# Altium PCB omnibothub-extcan.PcbDoc
Units mil, origin at the board's own origin, x right, y up, seen from the top; angles counter-clockwise.
Board outline 1845.1 x 2231.05 mil, 4 copper layers (Top Layer, Mid-Layer 1, Mid-Layer 2, Bottom Layer); 49 components, 65 nets, 211 pads, 76 vias.
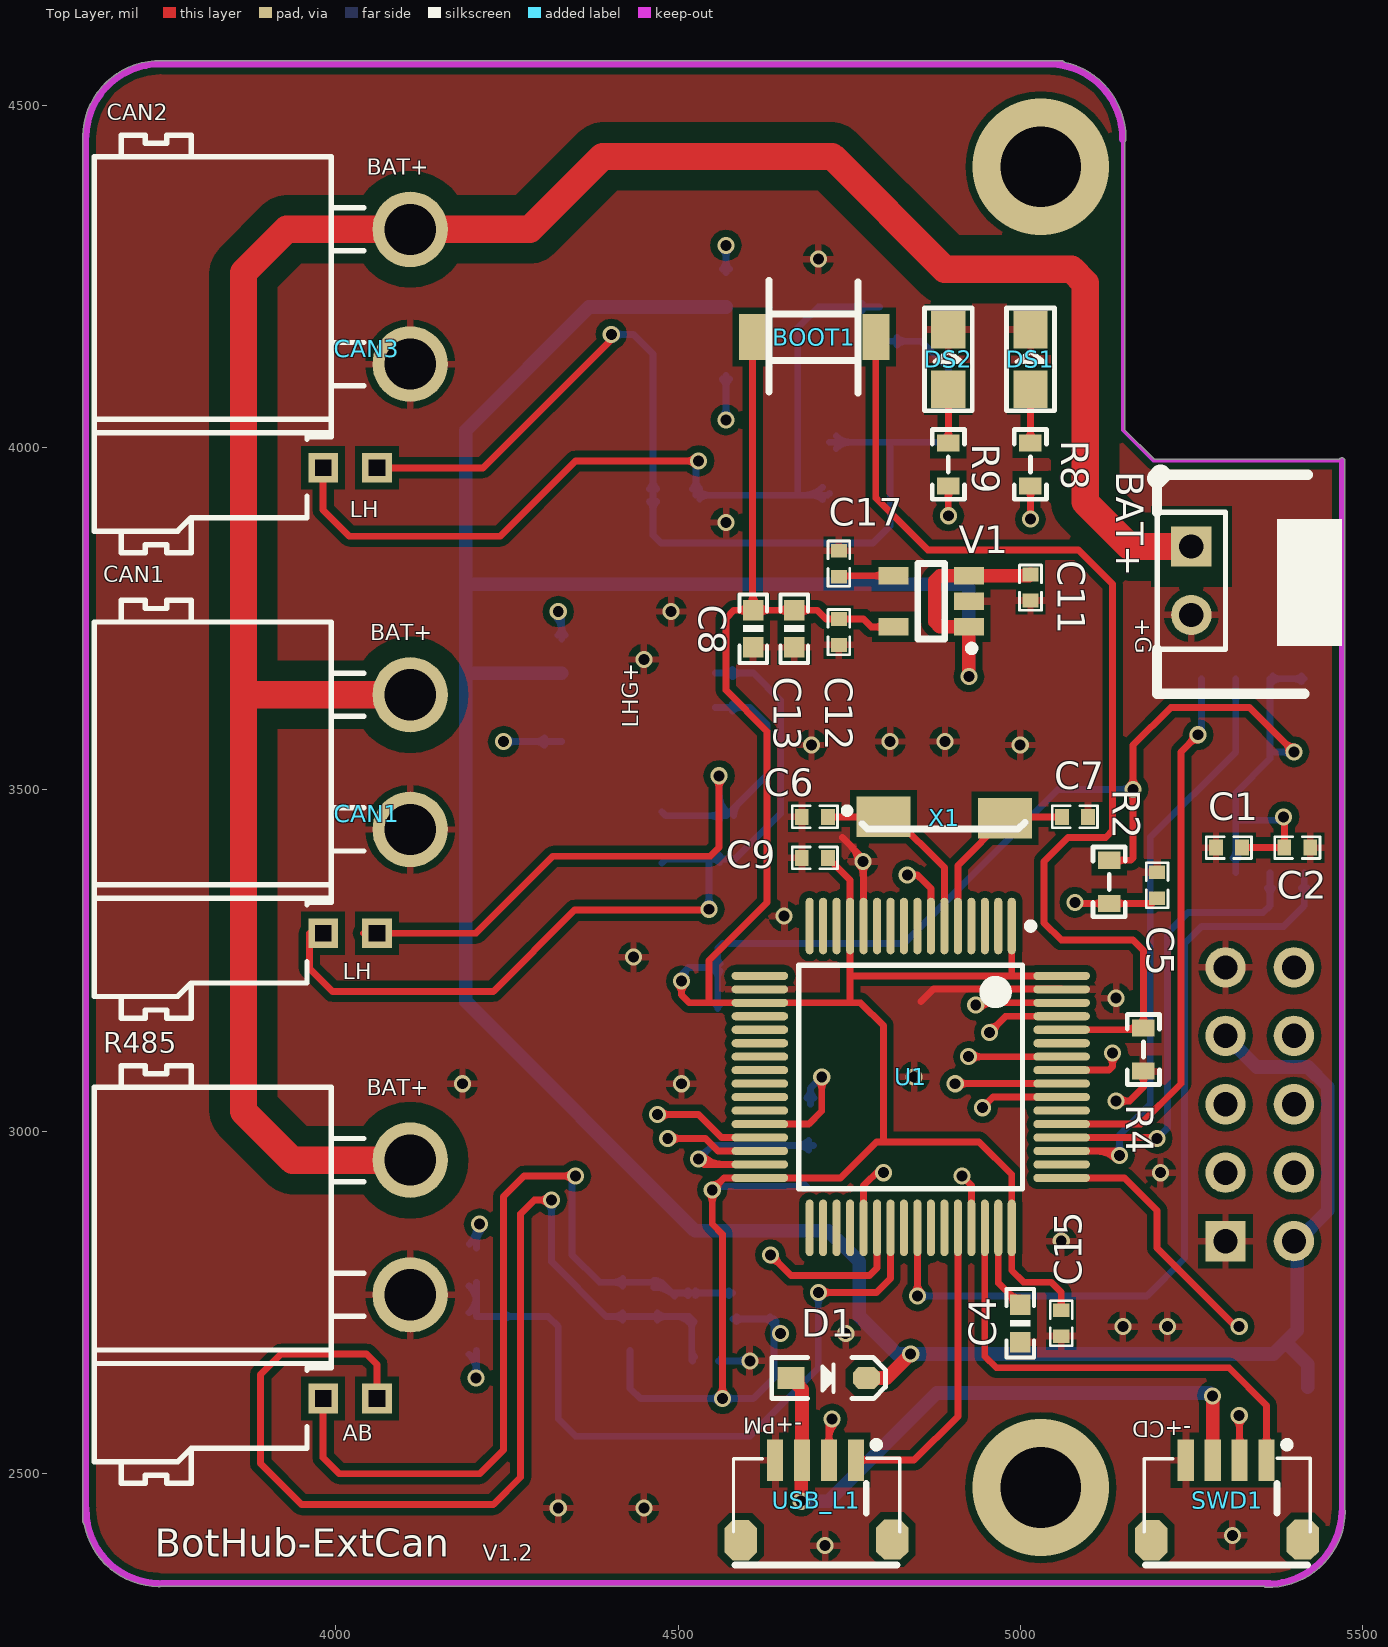
[diagram p0: Top Layer view]
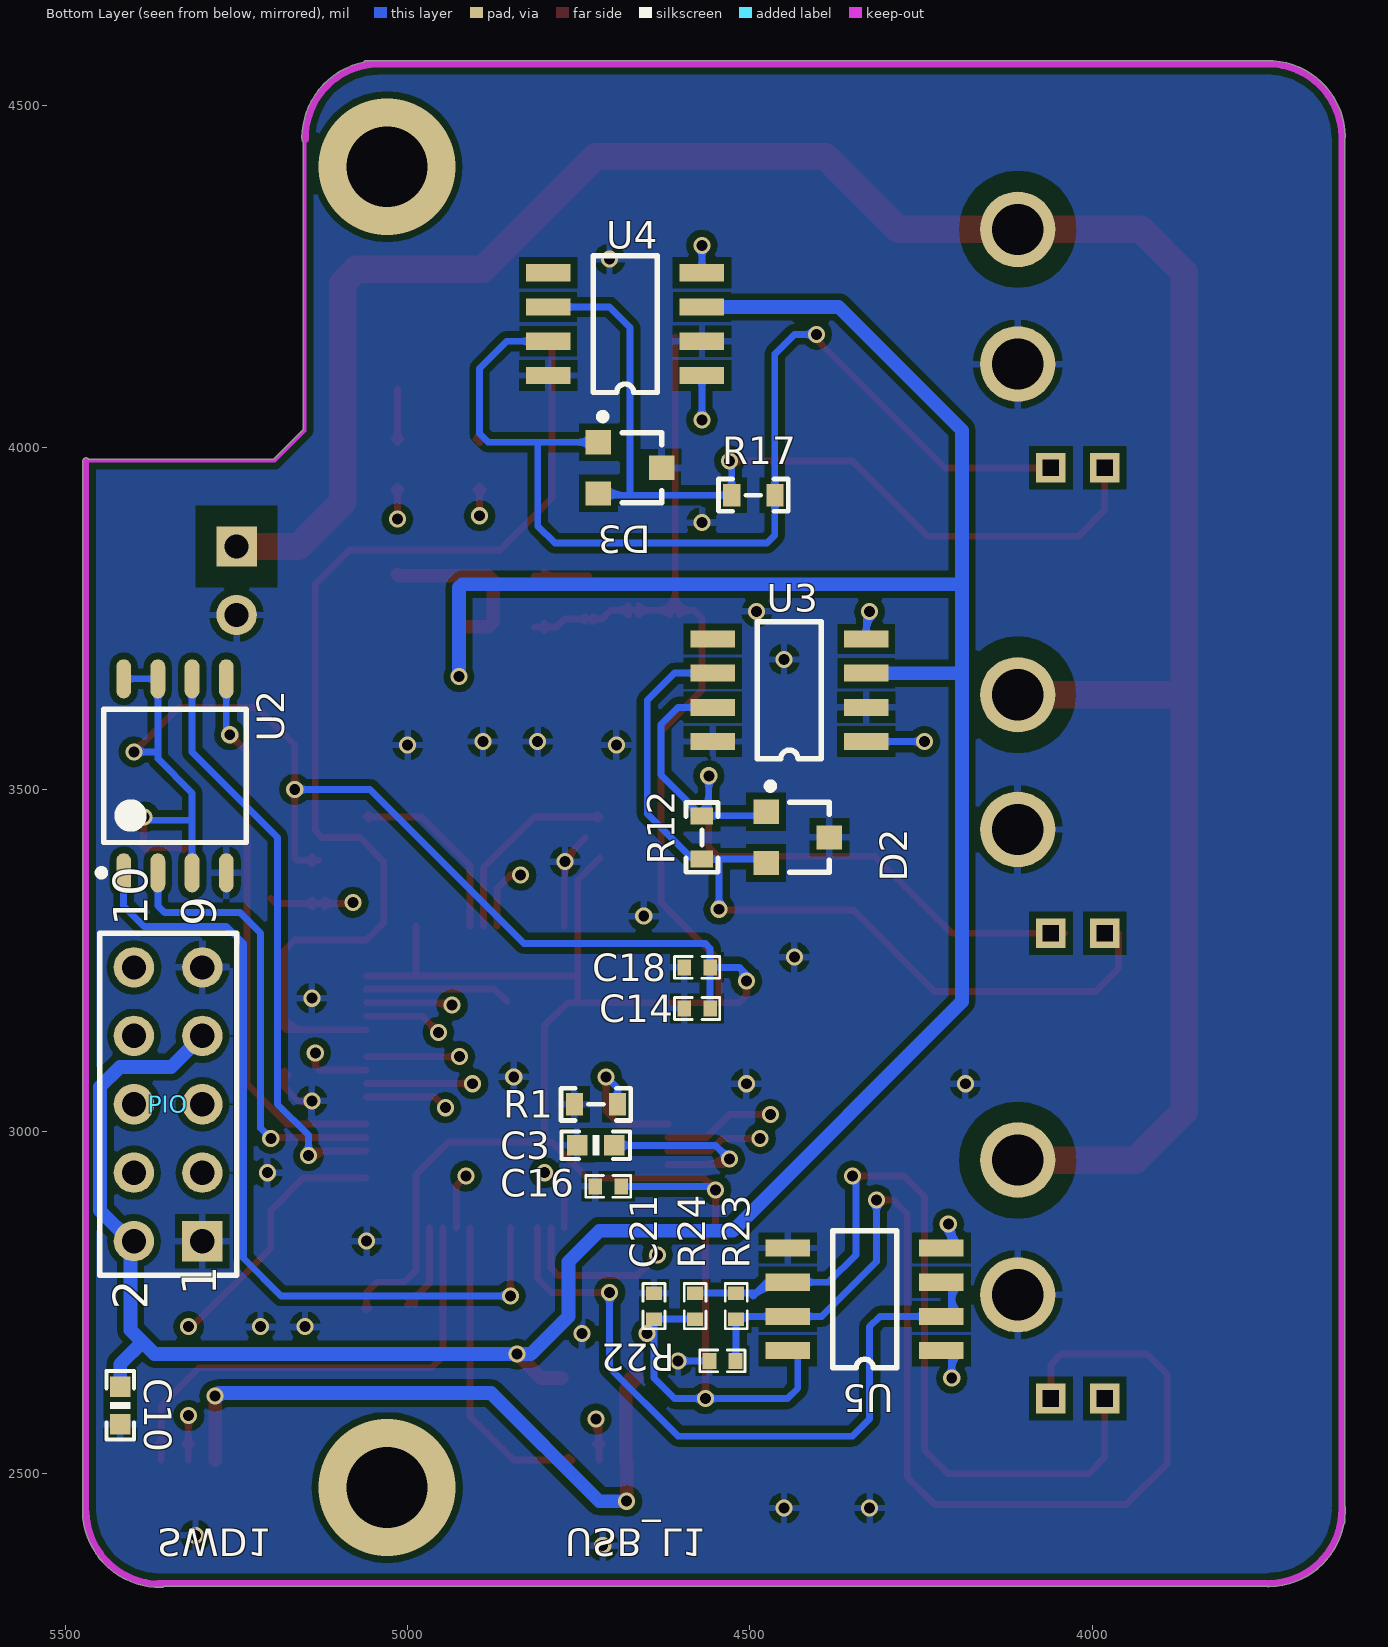
[diagram p1: Bottom Layer view, seen from below]
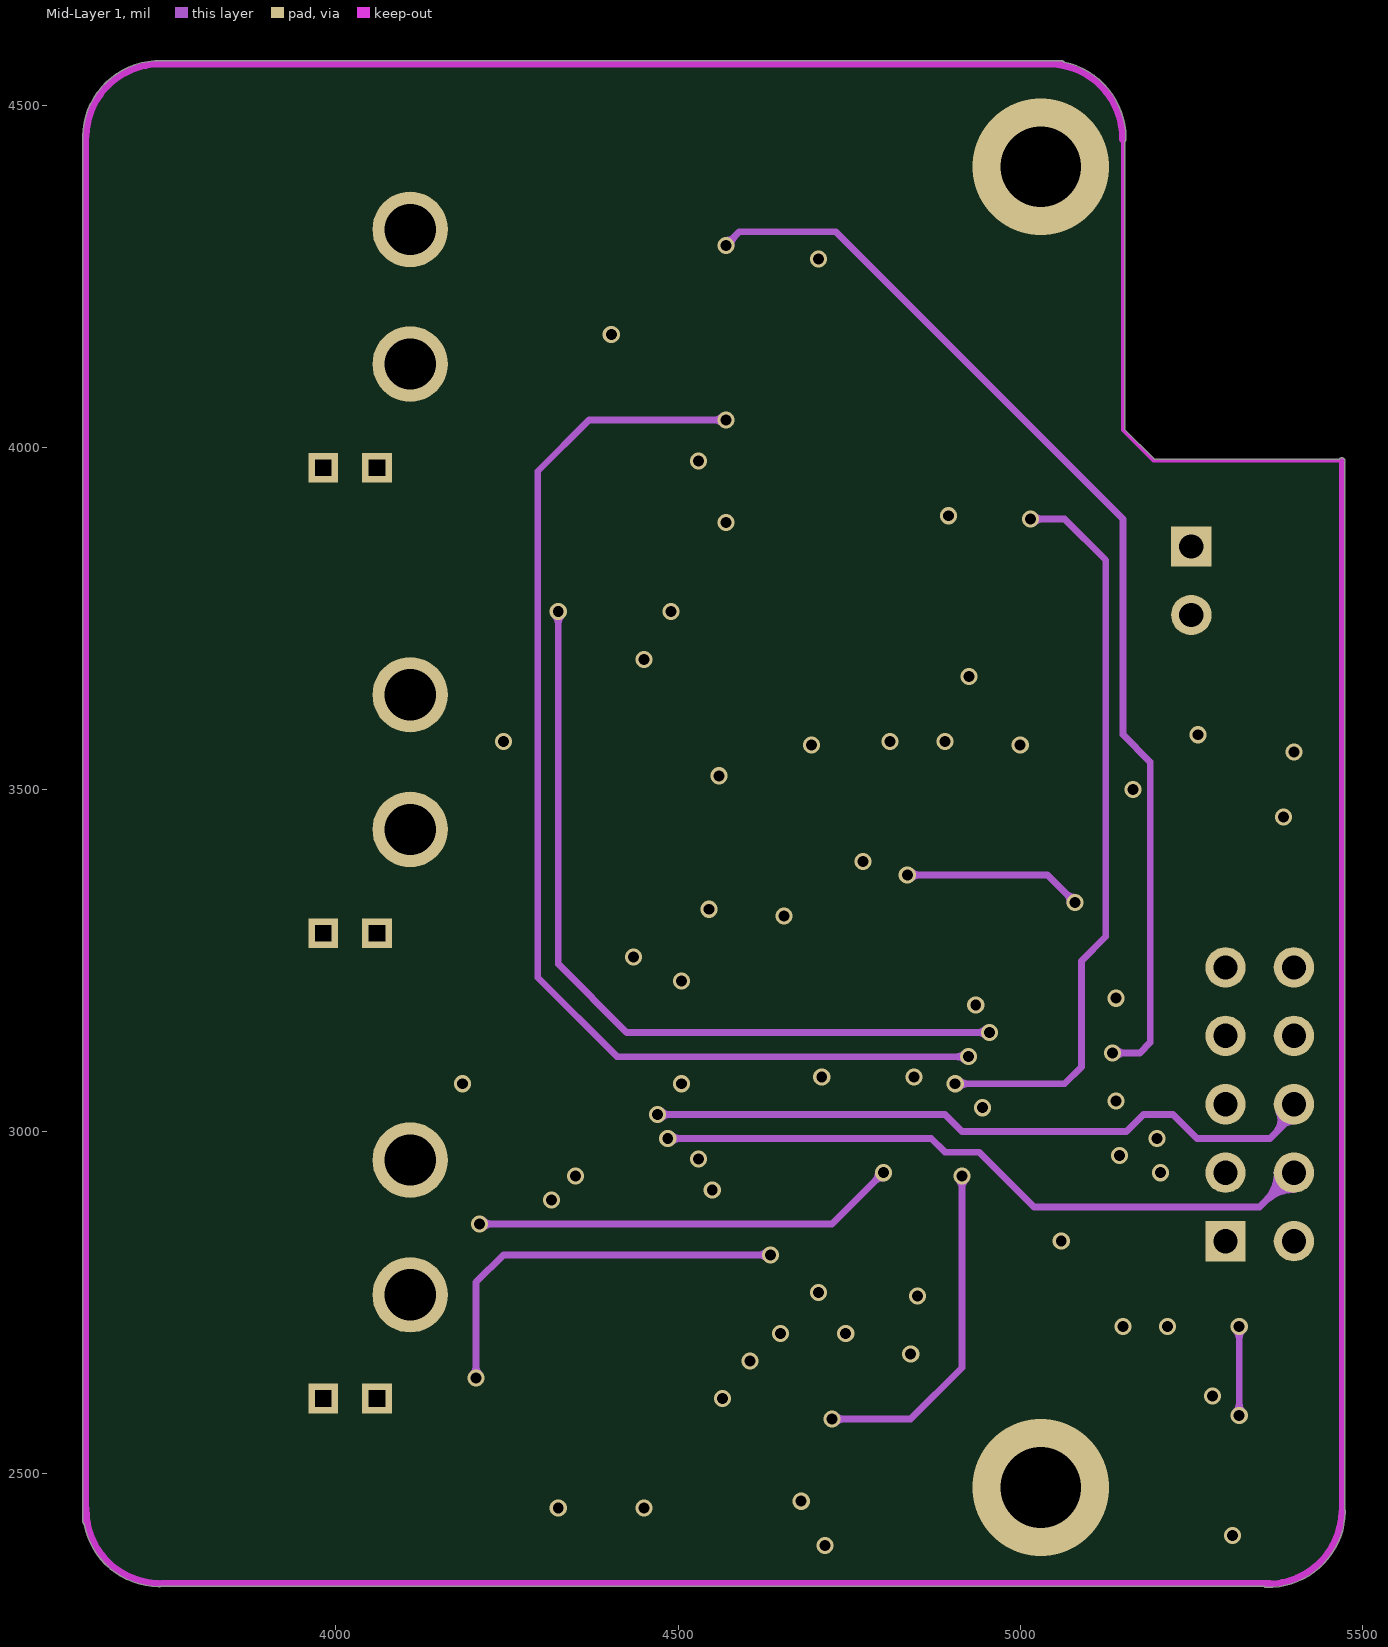
[diagram p2: Mid-Layer 1]
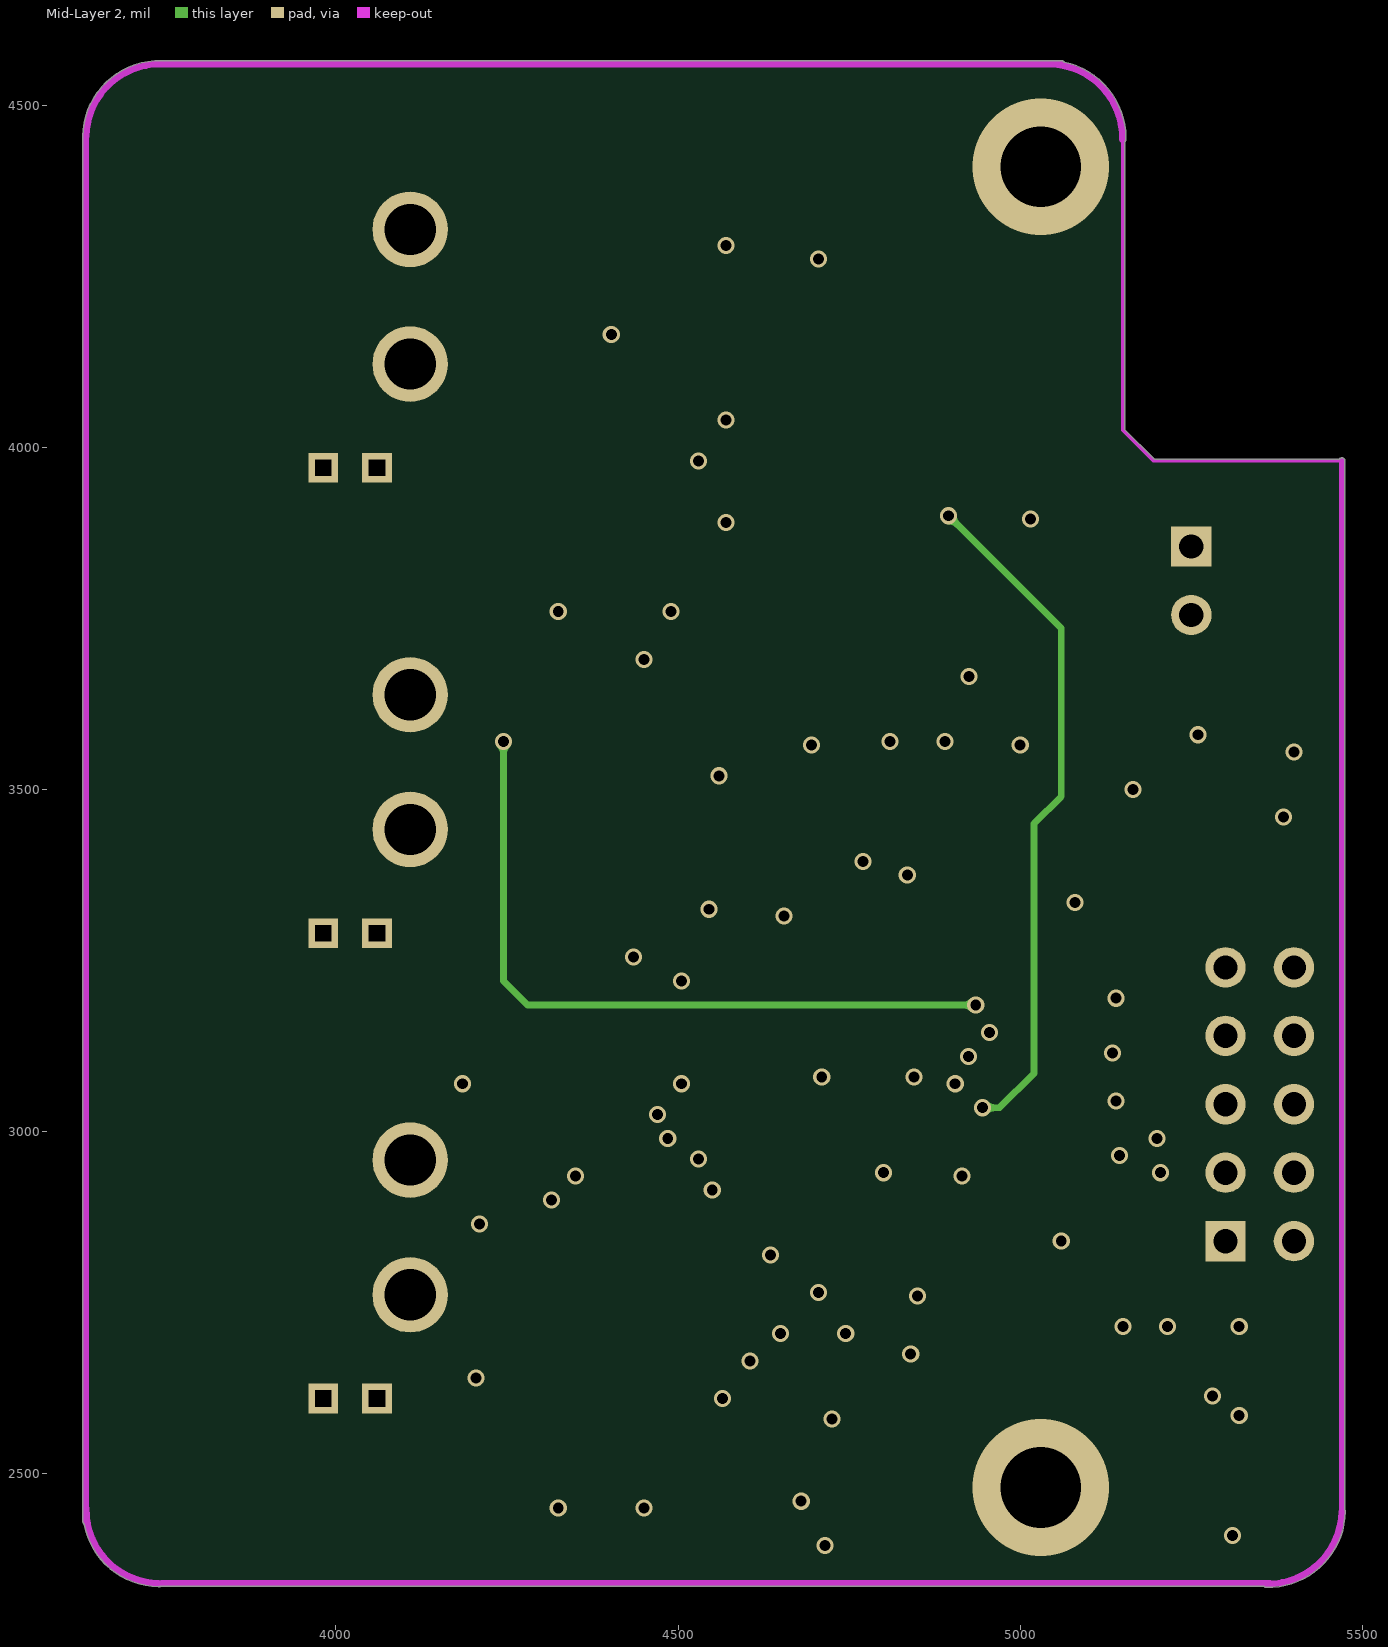
[diagram p3: Mid-Layer 2]
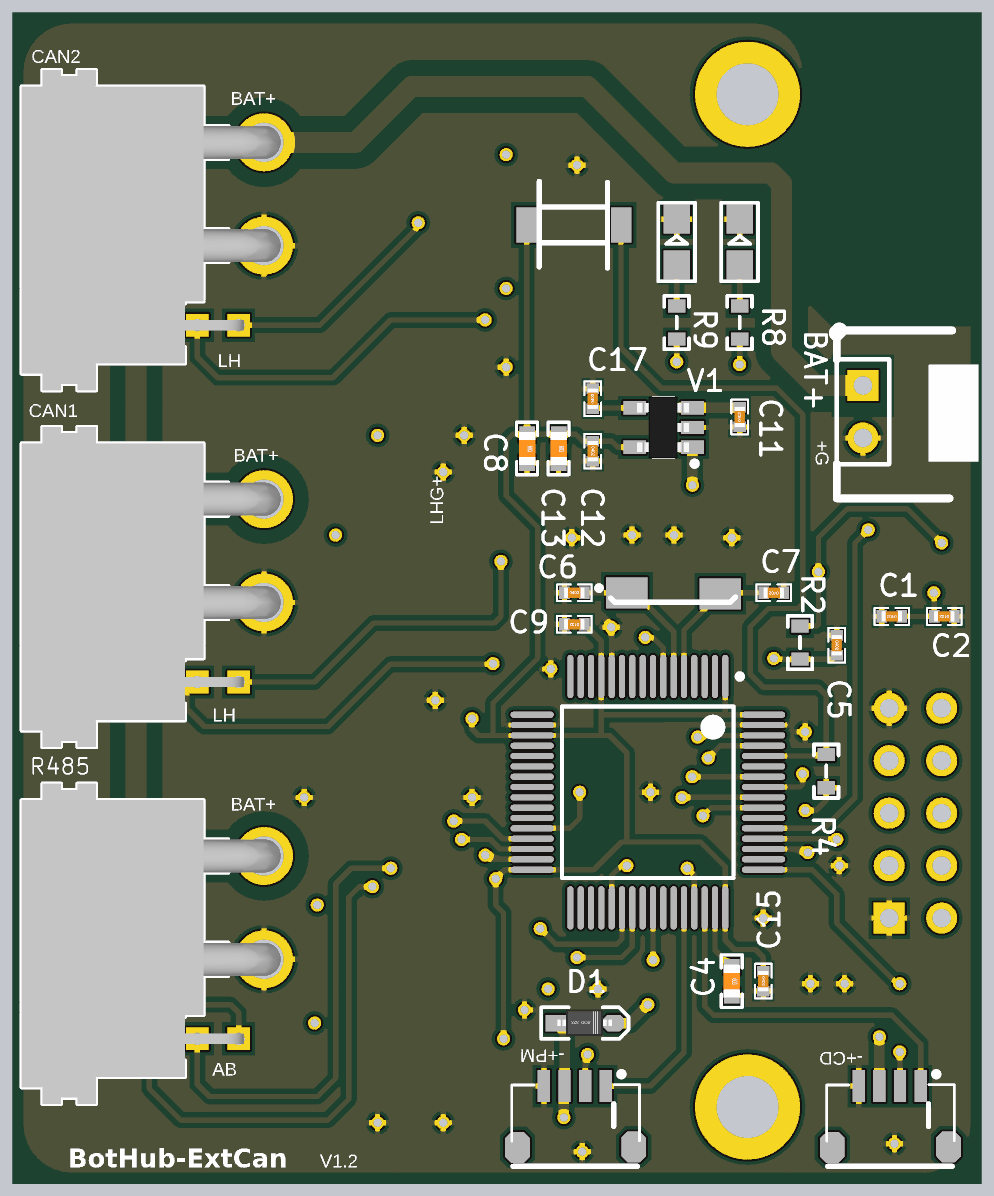
[diagram p4: 3D render of the assembled board from above, using the file's embedded part models]

## Layer stack, top to bottom
Top Layer: signal copper 1.4
Dielectric: dielectric 12.6, FR-4, Dk 4.8
Mid-Layer 1: signal copper 1.4
Dielectric: dielectric 12.6, FR-4, Dk 4.8
Mid-Layer 2: signal copper 1.4
Dielectric: dielectric 12.6, FR-4, Dk 4.8
Bottom Layer: signal copper 1.4

## Board outline
3631.99,2426.63 cw(c3635,2430) 3630.49,2430 3630.49,2437.12 cw(c3743.02,2447.94) 3629.99,2450.1 cw(c3635,2450) 3630.49,2452.18 3630.49,4451.76 cw(c3634.92,4454.1) 3629.91,4454.19 cw(c3742.94,4452.04) 3745.05,4565.07 cw(c3742.94,4452.04) 3745.1,4565.07 3745.05,4565.07 5043.39,4565.03 5043.44,4565.03 cw(c5043.42,4560.02) 5043.51,4565.03 5043.44,4565.03 5060,4565.03 cw(c5060,4560.02) 5064.23,4562.71 cw(c5041.36,4452) 5154.41,4452 cw(c5041.36,4452) 5154.39,4449.85 cw(c5149.38,4449.94) 5152.52,4446.03 5152.52,4026.04 5196.04,3982.51 5466.25,3982.51 cw(c5470,3980) 5474.52,3980 5474.52,2447.18 cw(c5470,2445) 5475.02,2445 cw(c5470,2445) 5475.01,2444.9 cw(c5361.98,2447.06) 5359.83,2334.02 cw(c5359.92,2339.04) 5356.39,2335.49 3745,2335.49 cw(c3745,2340) 3743.65,2335.69 cw(c3740.96,2339.92) 3740.87,2334.91 cw(c3743.02,2447.94)

## Design rules (kind name [scope] priority, off if disabled: settings)
Clearance Clearance_3 [(InPolygon) vs InNet('VCC_DJ')] p1: gap=30
Clearance Clearance_2 [(InPolygon) vs InNet('POWER')] p2: gap=30
Clearance Clearance_1 [(InPolygon)] p3: gap=10
Clearance [All] p4: gap=6
PolygonConnect [All] p1: connectstyle=Relief reliefconductorwidth=10 reliefentries=4 polygonreliefangle="90 Angle"
RoutingVias [All] p1: holewidth=28 width=50 viastyle="Through Hole" minholewidth=16 minwidth=25 maxholewidth=28 maxwidth=50
SilkscreenOverComponentPads [All] p1: minsilkscreentomaskgap=10
SolderMaskExpansion [All] p1: expansion=4
Width [All] p1: maxlimit=100 minlimit=10 preferedwidth=10 midlayer1_maxwidth=80 midlayer2_maxwidth=80 minimp=50.000000 maximp=50.000000 favimp=50.000000
27 further rules are at their usual default settings.

## Components (designator, comment, footprint, x,y, rotation, side; value= is the part's Value field where it differs from the comment)
BAT+ "Header 2" HDR1X2 5250,3855 r270 top (schematic designator BAT)
BOOT1 "Header 2" 663*4*2.0/2.5MM 4735,4145 r180 top
C1 "0.1UF" "C 0402" 5305,3415 r180 top
C2 "1UF" "C 0402" 5405,3415 r180 top
C3 "2.2UF" C0603 4725,2980 r0 bottom
C4 "2.2UF" C0603 5000,2720 r270 top
C5 "10NF" "C 0402" 5200,3360 r270 top
C6 "20PF" "C 0402" 4700,3460 r0 top
C7 "20PF" "C 0402" 5080,3460 r180 top
C8 "0.1UF" C0603 4610,3735 r270 top
C9 "0.1UF" "C 0402" 4700,3400 r180 top
C10 "10uF" C0603 5420,2600 r270 bottom
C11 "0.1uF" "C 0402" 5015,3795 r90 top
C12 "0.1uF" "C 0402" 4735,3730 r270 top
C13 "10uF" C0603 4670,3735 r270 top
C14 "0.1UF" "C 0402" 4576.97,3180 r0 bottom
C15 "0.1UF" "C 0402" 5060,2720 r270 top
C16 "0.1UF" "C 0402" 4706.97,2920 r0 bottom
C17 "0.1uF" "C 0402" 4735,3830 r90 top
C18 "0.1UF" "C 0402" 4576.97,3240 r0 bottom
C21 "0.1uF" "C 0402" 4640,2745 r270 bottom
CAN1 "Header 4" AMASS-XT30(2+2)PW-M_V1 3820,3540 r270 top
CAN3 "Header 4" AMASS-XT30(2+2)PW-M_V1 3820,4220 r270 top
D1 "BAT54WS" SOD-323 4720,2640 r180 top
D2 "PESD1CAN" SOT-23 4430,3430 r270 bottom
D3 "PESD1CAN" SOT-23 4675,3970 r270 bottom
DS1 "LED1" SMDLED 5014.94,4084.97 r90 top
DS2 "LED1" SMDLED 4894.94,4084.97 r90 top
PIO "Header 5X2" HDR2X5 5300,2840 r90 bottom
R1 "10K" R0603 4725,3040 r180 bottom
R2 "10K" R0603 5130,3365 r90 top
R4 "10K" R0603 5180,3120 r90 top
R8 "100R" R0603 5014.94,3974.97 r90 top
R9 "100R" R0603 4894.94,3974.97 r90 top
R12 "120R" R0603 4570,3430 r90 bottom
R17 "120R" R0603 4495,3930 r180 bottom
R22 "360R" "R 0402" 4540,2665 r180 bottom
R23 "120R" "R 0402" 4520,2745 r90 bottom
R24 "360R" "R 0402" 4580,2745 r270 bottom
R485 "Header 4" AMASS-XT30(2+2)PW-M_V1 3820,2860 r270 top
SWD1 "Header 4" "SH1.0-4P - UP" 5360,2520 r180 top
U1 "STM32F405RGT6" LQFP64_M 4840,3080 r270 top locked
U2 "W25X16" W25Q32FVZPIG 5340,3520 r90 bottom
U3 "TJA1050" SOP-8 4330,3570 r0 bottom
U4 "TJA1050" SOP-8 4570,4105 r0 bottom
U5 "SP3485" SOP-8 4220,2680 r0 bottom
USB_L1 "Header 4" "SH1.0-4P - UP" 4760,2520 r180 top
V1 "RT9193-3.3/LP2985/SPX3819" SOT23-5 4870,3775 r0 top
X1 "8MHZ" PXCL 4800,3460 r270 top

## Footprints (in the part's own frame and the unit in brackets; to place one, negate y for a bottom-side part, rotate by r counter-clockwise, add the part's x,y. Pads: shape width x height; smd on the part's side, far side on the other; paste and mask are expansions set on the pad)
663*4*2.0/2.5MM [mil] "小龟按键"
  rect 39.37x66.93 smd: 1(126,-16) 2(-54,-16)
  silkscreen extent -28,-99 102,66
AMASS-XT30(2+2)PW-M_V1 [mm] "TH, 4-Leads, Body 15.5x12.53mm"
  round 2.8 hole 1.9: 1(-2.5,7.33) 2(2.5,7.33)
  rect 1.1x1.1 hole 0.6 square: 3(6.35,6.1) 4(6.35,4.1)
  silkscreen extent -6,-4.4 9.5,5.6, body extent -6,-4.4 9.5,8.13, height 5.2
C0603 [mil]
  rect 30x30 smd: 1(-27,0) 2(27.5,-0.06)
  silkscreen extent -50,-20 50,20, body extent -31,-16 31,16, height 12
"C 0402" [mil]
  rect 20x23.62 smd: 1(-19,0) 2(19,0)
  silkscreen extent -33,-16 33,16, body extent -20,-10 20,10, height 20
HDR1X2 [mm] "Connector; Header; 2 Position"
  rect 1.5x1.5 hole 0.9: 1(0,0)
  round 1.5 hole 0.9: 2(2.54,0)
  silkscreen extent -1.27,-1.27 3.81,1.27
HDR2X5 [mm] "Connector; Header; 5x2 Position"
  rect 1.5x1.5 hole 0.9: 1(0,0)
  round 1.5 hole 0.9: 2(0,2.54) 3(2.54,0) 4(2.54,2.54) 5(5.08,0) 6(5.08,2.54) 7(7.62,0) 8(7.62,2.54) 9(10.16,0) 10(10.16,2.54)
  silkscreen extent -1.27,-1.27 11.43,3.81
LQFP64_M [mm] "Thin QFP, 64-Leads, Body 10x10mm, Pitch 0.5mm, IPC Low Density"
  oval 2.1x0.3 smd: 1(-5.6,3.75) 2(-5.6,3.25) 3(-5.6,2.75) 4(-5.6,2.25) 5(-5.6,1.75) 6(-5.6,1.25) 7(-5.6,0.75) 8(-5.6,0.25) 9(-5.6,-0.25) 10(-5.6,-0.75) 11(-5.6,-1.25) 12(-5.6,-1.75) 13(-5.6,-2.25) 14(-5.6,-2.75) 15(-5.6,-3.25) 16(-5.6,-3.75) 33(5.6,-3.75) 34(5.6,-3.25) 35(5.6,-2.75) 36(5.6,-2.25) 37(5.6,-1.75) 38(5.6,-1.25) 39(5.6,-0.75) 40(5.6,-0.25) 41(5.6,0.25) 42(5.6,0.75) 43(5.6,1.25) 44(5.6,1.75) 45(5.6,2.25) 46(5.6,2.75) 47(5.6,3.25) 48(5.6,3.75)
  oval 0.3x2.1 smd: 17(-3.75,-5.6) 18(-3.25,-5.6) 19(-2.75,-5.6) 20(-2.25,-5.6) 21(-1.75,-5.6) 22(-1.25,-5.6) 23(-0.75,-5.6) 24(-0.25,-5.6) 25(0.25,-5.6) 26(0.75,-5.6) 27(1.25,-5.6) 28(1.75,-5.6) 29(2.25,-5.6) 30(2.75,-5.6) 31(3.25,-5.6) 32(3.75,-5.6) 49(3.75,5.6) 50(3.25,5.6) 51(2.75,5.6) 52(2.25,5.6) 53(1.75,5.6) 54(1.25,5.6) 55(0.75,5.6) 56(0.25,5.6) 57(-0.25,5.6) 58(-0.75,5.6) 59(-1.25,5.6) 60(-1.75,5.6) 61(-2.25,5.6) 62(-2.75,5.6) 63(-3.25,5.6) 64(-3.75,5.6)
  silkscreen extent -5.72,-4.15 4.15,4.58, body extent -5,-5 5,5, height 1.6
PXCL [mm]
  rect 1.5x2 smd: 1(0,0) 2(0.051,4.521)
  silkscreen extent -0.34,-1.45 0.46,5.26
R0603 [mil] "ÌùÆ"
  rect 25x33 smd: 1(-31.5,0) 2(31.5,0)
  silkscreen extent -51,-24 51,24, body extent -32,-16 32,16, height 20
"R 0402" [mil]
  rect 20x23.62 smd: 1(-19,0) 2(19,0)
  silkscreen extent -33,-16 33,16, body extent -20,-10 20,10, height 12
"SH1.0-4P - UP" [mm]
  rect 0.6x1.55 smd: 1(0,0) 2(1,0) 3(2,0) 4(3,0)
  oct 1.2x1.5 smd: 1.(4.279,2.972) A(-1.346,2.946)
  silkscreen extent -1.63,-0.7 4.55,3.89
SMDLED [mm]
  rect 1.4x1.27 smd: 1(0.001,-0.002) 2(2.211,-0.002)
  silkscreen extent -0.8,-0.89 3.01,0.89
SOD-323 [mm] "1.8x1.3X0.9mm（长宽高，不包括引脚）"
  rect 1x0.8 smd: 1(1.4,0)
  oct 1x0.8 smd: 2(-1.4,0)
  silkscreen extent -2.11,-0.76 2.11,0.76, body extent -1.31,-0.67 1.34,0.63, height 1
SOP-8 [mil]
  rect 65x25 smd: 1(0,0) 2(0,-50) 3(0,-100) 4(0,-150) 5(224.41,-150) 6(224.41,-100) 7(224.41,-50) 8(224.41,0)
  silkscreen extent 65,-175 159,25
SOT23-5 [mm]
  rect 1.1x0.65 smd: 1(1.4,-0.95) 2(1.4,0) 3(1.4,0.95) 4(-1.4,0.95) 5(-1.4,-0.95)
  silkscreen extent -0.5,-1.87 1.63,1.4, body extent -1.28,-1.5 1.22,1.5, height 1.05
SOT-23 [mm]
  rect 0.9x0.95 smd: 1(-0.95,-1.175) 2(0.95,-1.175) 3(0,1.175)
  silkscreen extent -2.03,-1.14 1.3,1.18
W25Q32FVZPIG [mm] "SOP, 8-Leads, Body 5.3x5.3mm (max), Pitch 1.27mm, IPC Medium Density"
  oval 1.45x0.55 smd: 1(-3.6,1.905) 2(-3.6,0.635) 3(-3.6,-0.635) 4(-3.6,-1.905) 5(3.6,-1.905) 6(3.6,-0.635) 7(3.6,0.635) 8(3.6,1.905)
  silkscreen extent -3.72,-2.65 2.47,2.86, body extent -2.64,-2.64 2.64,2.64, height 2.65

## Part data
BAT+ BOOT1: "Header, 2-Pin"
C1 C2 C5 C8 C9 C10 C12 C13 C14 C15 C16 C18: library part CAP, "Capacitor"
C3 C4: library part CAP1, "胆电容"
C6 C7: library part C2, "0805"
C11 C17 C21: library part Capacitor, "普通电容"
CAN1 CAN3 R485 SWD1 USB_L1: "Header, 4-Pin"
D1: library part BAT54, "单肖特基二极管"
DS1 DS2: library part LED2, "Typical RED, GREEN, YELLOW, AMBER GaAs LED"
PIO: "Header, 5-Pin, Dual row"
R1 R2 R4 R8 R9 R12 R17 R22 R23 R24: library part Res2, "0603"
U2: "W25X16;SST25VF016;MX25L1605"
U3 U4: library part SN65HVD230D
U5: library part MAX3485
V1: "降压IC"
X1: library part XTAL, "Crystal Oscillator"

## Via types
v1: diameter 25, hole 16, Top Layer to Bottom Layer, 74 vias
v2: diameter 200, hole 118.11, Top Layer to Bottom Layer, 2 vias

## Nets (pads, with @x,y where several pads share a name; then routed paths per layer and width w, separated by ;. In a path a pad name is that pad's centre, name@x,y a point inside that pad or via, vN(x,y) a via of type N, cw(c..) or ccw(c..) an arc to the next point about the centre after c; other vN are vias at no path point)
3.3V: BOOT1.1 C1.1 C2.2 C8.1 C9.1 C12.1 C13.1 C14.1 C15.1 C16.1 C18.1 C21.2 R2.2 R24.2 U1.1 U1.13 U1.19 U1.32 U1.48 U1.64 U2.3 U2.7 U2.8 U5.8 V1.5 | length 6905.9
  Top Layer w10: v1@4499.7,3214.7 cw(c4486.89,3201.89) 4505,3201.89 cw(c4523.11,3201.89) v1@4510.3,3214.7 ; v1(4505,3220) 4505,3200 4516.73,3188.27 4545,3188.27 ; v1@4544.7,2909.7 cw(c4531.89,2896.89) 4550,2896.89 cw(c4568.11,2896.89) v1@4555.3,2909.7 ; v1@4550,2922.5 ccw(c4550,2940.61) 4562.8,2927.8 ccw(c4575.61,2915) v1@4557.5,2915 ; v1@4559.7,2615.3 ccw(c4546.89,2628.11) 4565,2628.11 ccw(c4583.11,2628.11) v1@4570.3,2615.3 ; v1(4565,2610) 4565,2850 4550,2865 v1(4550,2915) 4567.36,2932.36 U1.32 4737.36,2932.36 4790,2985 4800,2985 ; C8.1@4602.93,3754.93 ccw(c4585.86,3737.86) 4585.86,3762 ccw(c4585.86,3786.14) 4602.93,3769.07 ccw(c4588.27,3783.73) 4609,3783.73 ; 4609,3788.56 ccw(c4636.56,3788.56) 4617.07,3769.07 ccw(c4634.14,3786.14) 4634.14,3762 ccw(c4634.14,3737.86) C8.1@4617.07,3754.93 ; BOOT1.1 4609,3763 C8.1 ; C13.1@4662.93,3754.93 ccw(c4645.86,3737.86) 4645.86,3762 ccw(c4645.86,3786.14) C13.1@4662.93,3769.07 ; C13.1@4677.07,3754.93 cw(c4694.14,3737.86) 4694.14,3762 cw(c4694.14,3786.14) C13.1@4677.07,3769.07 ; C9.1 4751.42,3367.58 U1.13 4751.42,3188.27 ; C12.1@4729.65,3745.46 ccw(c4721.12,3736.93) 4721.12,3749 ccw(c4721.12,3761.07) C12.1@4729.65,3752.54 ; C12.1@4740.35,3745.46 cw(c4748.88,3736.93) 4748.88,3749 cw(c4748.88,3761.07) C12.1@4740.35,3752.54 ; 4745,3188.27 4725,3188.27 ; 4753.78,3227.64 U1.64 ; V1.5@4800.51,3732.09 ccw(c4787.2,3718.78) 4787.2,3737.6 ccw(c4787.2,3756.42) V1.5@4800.51,3743.11 ; V1.5 4782.4,3737.6 4771,3749 C12.1 4716,3749 4703,3762 C13.1 C8.1 ; 4987.64,3230 U1.1 ; C15.1@5056.46,2742.54 ccw(c5047.93,2751.07) 5060,2751.07 ccw(c5072.07,2751.07) C15.1@5063.54,2742.54 ; C15.1 5060,2765 5045,2780 5005,2780 4987.64,2797.36 U1.48 4987.64,2937.36 4940,2985 4800,2985 ; R2.2 5161.5,3396.5 5165,3400 5165,3565 5220,3620 5335,3620 v1(5400,3555) ; R2.2@5139.3,3391.2 cw(c5152.11,3378.39) 5152.11,3396.5 cw(c5152.11,3414.61) R2.2@5139.3,3401.8 ; v1@5159.7,3494.7 cw(c5146.89,3481.89) 5165,3481.89 cw(c5183.11,3481.89) v1@5170.3,3494.7 ; v1@5159.7,3505.3 ccw(c5146.89,3518.11) 5165,3518.11 ccw(c5183.11,3518.11) v1@5170.3,3505.3 ; C1.1 C2.2 v1@5386,3459 ; C1.1@5327.54,3411.46 cw(c5336.07,3402.93) 5336.07,3415 cw(c5336.07,3427.07) C1.1@5327.54,3418.54 ; C2.2@5382.46,3411.46 ccw(c5373.93,3402.93) 5373.93,3415 ccw(c5373.93,3427.07) C2.2@5382.46,3418.54 ; C2.2@5382.46,3420.35 ccw(c5373.93,3428.88) 5386,3428.88 ccw(c5398.07,3428.88) C2.2@5389.54,3420.35 ; v1@5392.5,3555 ccw(c5374.39,3555) 5387.2,3567.8 ccw(c5400,3580.61) v1@5400,3562.5 ; 4545,3188.27 U1.19 4725,3188.27 ; 4545,3188.27 4545,3250 4630,3335 4630,3585 4570,3645 4570,3750 4582,3762 C8.1 ; 4725,3188.27 4751.42,3188.27 ; 4751.42,3188.27 4766.73,3188.27 4800,3155 4800,2985
  Bottom Layer w10: U5.8@4430,2680 4430,2625 4445,2610 v1(4565,2610) 4610,2610 4640,2640 C21.2 ; v1(4505,3220) 4505,3230 4515,3240 ; v1@4511.85,3223.05 cw(c4525.77,3229.23) 4515,3240 ; v1(4550,2915) 4555,2920 C16.1 ; C14.1@4554.43,3185.35 ccw(c4545.9,3193.88) 4557.97,3193.88 ccw(c4570.04,3193.88) C14.1@4561.5,3185.35 ; C18.1@4554.43,3234.65 cw(c4545.9,3226.12) 4557.97,3226.12 cw(c4570.04,3226.12) C18.1@4561.5,3234.65 ; C18.1@4554.43,3236.46 ccw(c4545.9,3227.93) 4545.9,3240 ccw(c4545.9,3252.07) C18.1@4554.43,3243.54 ; C18.1@4554.43,3245.35 ccw(c4545.9,3253.88) 4557.97,3253.88 ccw(c4570.04,3253.88) C18.1@4561.5,3245.35 ; C14.1 C18.1 ; v1@4559.7,2604.7 ccw(c4546.89,2591.89) 4546.89,2610 ccw(c4546.89,2628.11) v1@4559.7,2615.3 ; v1@4570.3,2604.7 cw(c4583.11,2591.89) 4583.11,2610 cw(c4583.11,2628.11) v1@4570.3,2615.3 ; R24.2 C21.2 ; R24.2@4585.35,2722.46 cw(c4593.88,2713.93) 4593.88,2726 cw(c4593.88,2738.07) R24.2@4585.35,2729.54 ; C21.2@4634.65,2722.46 ccw(c4626.12,2713.93) 4626.12,2726 ccw(c4626.12,2738.07) C21.2@4634.65,2729.54 ; C21.2@4636.46,2722.46 cw(c4627.93,2713.93) 4640,2713.93 cw(c4652.07,2713.93) C21.2@4643.54,2722.46 ; 4640,2714 ccw(c4651.65,2714) v1@4649.55,2702.54 ; v1@4651.35,2712.38 cw(c4653.85,2726) C21.2 ; C16.1@4684.43,2916.46 ccw(c4675.9,2907.93) 4675.9,2920 ccw(c4675.9,2932.07) C16.1@4684.43,2923.54 ; v1@5159.7,3494.7 ccw(c5146.89,3481.89) 5146.89,3500 ccw(c5146.89,3518.11) v1@5159.7,3505.3 ; v1(5165,3500) 5055,3500 4830,3275 4565,3275 4557.97,3267.97 C18.1 ; U2.3@5310.88,3400.1 ccw(c5300.93,3410.05) 5315,3410.05 ccw(c5329.07,3410.05) U2.3@5319.12,3400.1 ; U2.3 5315,3455 ; U2.7@5360.88,3639.9 cw(c5350.93,3629.95) 5365,3629.95 cw(c5379.07,3629.95) U2.7@5369.12,3639.9 ; U2.7@5369.12,3657.61 cw(c5379.07,3647.67) 5379.07,3661.73 cw(c5379.07,3675.8) U2.7@5369.12,3665.85 ; v1(5385,3460) 5380,3455 5315,3455 ; v1@5394.7,3549.7 ccw(c5381.89,3536.89) 5381.89,3555 ccw(c5381.89,3573.11) v1@5394.7,3560.3 ; v1(5400,3555) 5365,3555 ; U2.8@5410.88,3657.61 ccw(c5400.93,3647.67) 5400.93,3661.73 ccw(c5400.93,3675.8) U2.8@5410.88,3665.85 ; U2.8 U2.7 5365,3555 ; 4515,3240 C18.1 ; 5315,3455 5315,3495 5365,3545 5365,3555
  other v1: 4650,2705
5V: C10.1 C11.2 D1.2 PIO.2 PIO.7 U3.3 U4.3 V1.1 V1.3 | length 4826.4
  Top Layer w20: D1.2 4805,2640 v1(4840,2675) ; v1(4925,3665) V1.1@4925,3737.48 ; V1.1 4882.4,3737.6 4875,3745 4875,3805 4882.4,3812.4 V1.3 5013.4,3812.4 C11.2
  Bottom Layer w20: U3.3 4190,3670 ; U4.3 4370,4205 4190,4025 4190,3800 ; v1(4925,3665) 4925,3795 4920,3800 4190,3800 ; PIO.7@5300,3135 5305,3135 5345.53,3094.47 5420.53,3094.47 5449.5,3065.5 5449.5,2884.5 5405,2840 5405,2710 5387.65,2692.65 ; C10.1 5420,2660.3 5387.65,2692.65 ; 4190,3670 4190,3190 4525,2855 4720,2855 4765,2810 4765,2730 4820,2675 v1(4840,2675) 5370,2675 5387.65,2692.65 ; 4190,3670 4190,3800
BAT: U1.20
BEEP: U1.59
CAN_RX1: U1.61 U3.4 | length 1485.1
  Top Layer w10: v1(4955,3145) 4978.58,3168.58 U1.61 ; v1@4955,3152.5 ccw(c4955,3170.61) 4967.8,3157.8 ccw(c4980.61,3145) v1@4962.5,3145
  Mid-Layer 1 w10: v1@4319.7,3754.7 cw(c4306.89,3741.89) 4325,3741.89 cw(c4343.11,3741.89) v1@4330.3,3754.7 ; v1(4325,3760) 4325,3245 4425,3145 v1(4955,3145) ; v1@4949.7,3139.7 ccw(c4936.89,3126.89) 4936.89,3145 ccw(c4936.89,3163.11) v1@4949.7,3150.3
  Bottom Layer w10: v1@4319.7,3754.7 cw(c4294.82,3729.82) U3.4@4330,3729.82 ; U3.4@4324.7,3725.3 ccw(c4311.89,3738.11) 4330,3738.11 ccw(c4348.11,3738.11) U3.4@4335.3,3725.3 ; v1(4325,3760) 4330,3755 U3.4
CAN_RX2: U1.57 U4.4 | length 1883.9
  Top Layer w10: U1.57 5129.84,3089.84 5135,3095 v1(5135,3115) ; v1@5129.7,3109.7 cw(c5116.89,3096.89) 5135,3096.89 cw(c5153.11,3096.89) v1@5140.3,3109.7
  Mid-Layer 1 w10: v1(4570,4295) 4590,4315 4730,4315 5150,3895 5150,3580 5190,3540 5190,3130 5175,3115 v1(5135,3115) ; v1@4570,4302.5 ccw(c4570,4320.61) 4582.8,4307.8 ccw(c4595.61,4295) v1@4577.5,4295 ; v1@5140.3,3109.7 cw(c5153.11,3096.89) 5153.11,3115 cw(c5153.11,3133.11) v1@5140.3,3120.3
  Bottom Layer w10: U4.4@4564.7,4260.3 ccw(c4551.89,4273.11) 4570,4273.11 ccw(c4588.11,4273.11) U4.4@4575.3,4260.3 ; v1@4564.7,4289.7 cw(c4551.89,4276.89) 4570,4276.89 cw(c4588.11,4276.89) v1@4575.3,4289.7 ; U4.4 v1(4570,4295)
CAN_TX1: U1.62 U3.1 | length 1403.1
  Top Layer w10: v1(4935,3185) 4938.27,3188.27 U1.62 ; v1@4940.3,3179.7 cw(c4961,3159) 4961,3188.27
  Mid-Layer 2 w10: v1@4239.7,3564.7 cw(c4226.89,3551.89) 4245,3551.89 cw(c4263.11,3551.89) v1@4250.3,3564.7 ; v1(4245,3570) 4245,3220 4280,3185 v1(4935,3185) ; v1@4929.7,3179.7 ccw(c4916.89,3166.89) 4916.89,3185 ccw(c4916.89,3203.11) v1@4929.7,3190.3
  Bottom Layer w10: v1(4245,3570) U3.1 ; v1@4250.3,3564.7 cw(c4263.11,3551.89) 4263.11,3570 cw(c4263.11,3588.11) v1@4250.3,3575.3 ; U3.1@4304.7,3564.7 ccw(c4291.89,3551.89) 4291.89,3570 ccw(c4291.89,3588.11) U3.1@4304.7,3575.3
CAN_TX2: U1.58 U4.1 | length 2066.6
  Top Layer w10: v1(4924.53,3109.53) U1.58 ; v1@4929.83,3104.22 cw(c4942.63,3091.42) 4942.63,3109.53 cw(c4942.63,3127.63) v1@4929.83,3114.83
  Mid-Layer 1 w10: v1@4564.7,4034.7 ccw(c4551.89,4021.89) 4551.89,4040 ccw(c4551.89,4058.11) v1@4564.7,4045.3 ; v1(4570,4040) 4370,4040 4295,3965 4295,3225 4410.47,3109.53 v1(4924.53,3109.53) ; v1@4919.22,3104.22 ccw(c4906.42,3091.42) 4906.42,3109.53 ccw(c4906.42,3127.63) v1@4919.22,3114.83
  Bottom Layer w10: v1@4564.7,4045.3 ccw(c4551.89,4058.11) 4570,4058.11 ccw(c4588.11,4058.11) v1@4575.3,4045.3 ; U4.1@4564.7,4099.7 cw(c4551.89,4086.89) 4570,4086.89 cw(c4588.11,4086.89) U4.1@4575.3,4099.7 ; v1(4570,4040) U4.1
CS_FLASH: U1.41 U2.1 | length 1297.4
  Top Layer w10: v1@4844.7,2765.3 ccw(c4831.89,2778.11) 4850,2778.11 ccw(c4868.11,2778.11) v1@4855.3,2765.3 ; U1.41 4850,2859.37 v1(4850,2760)
  Bottom Layer w10: v1(4850,2760) 5185,2760 5240,2815 5240,3275 5265,3300 5385,3300 5415,3330 U2.1 ; v1@4855.3,2754.7 cw(c4868.11,2741.89) 4868.11,2760 cw(c4868.11,2778.11) v1@4855.3,2765.3 ; U2.1@5410.88,3356.43 cw(c5400.93,3346.48) 5415,3346.48 cw(c5429.07,3346.48) U2.1@5419.12,3356.43
CS_IMU: U1.21
DM: U1.44 USB_L1.1 | length 476.8
  Top Layer w10: USB_L1.1 4845,2520 4908.9,2583.9 U1.44 ; USB_L1.1@4764.82,2515.18 cw(c4776.44,2503.56) 4776.44,2520 cw(c4776.44,2536.44) USB_L1.1@4764.82,2524.82
DP: U1.45 USB_L1.2 | length 752.6
  Top Layer w10: USB_L1.2@4715.81,2543.52 ccw(c4704.19,2555.14) 4720.63,2555.14 ccw(c4737.07,2555.14) USB_L1.2@4725.45,2543.52 ; USB_L1.2 4720.63,2575.63 v1(4725,2580) ; 4720.63,2551.34 cw(c4753.66,2551.34) v1@4730.3,2574.7 ; v1(4915,2935) 4928.58,2921.42 U1.45
  Mid-Layer 1 w10: v1(4725,2580) 4840,2580 4915,2655 v1(4915,2935) ; v1@4730.3,2574.7 cw(c4743.11,2561.89) 4743.11,2580 cw(c4743.11,2598.11) v1@4730.3,2585.3 ; v1@4909.7,2929.7 cw(c4896.89,2916.89) 4915,2916.89 cw(c4933.11,2916.89) v1@4920.3,2929.7
GND: BAT+.2 C1.2 C2.1 C3.2 C4.2 C5.1 C6.1 C7.1 C8.2 C9.2 C10.2 C11.1 C12.2 C13.2 C14.2 C15.2 C16.2 C17.2 C18.2 C21.1 CAN1.2 CAN3.2 D2.3 D3.3 DS1.2 DS2.2 PIO.1 PIO.9 R1.1 R4.1 R22.1 R485.2 SWD1.4 U1.12 U1.18 U1.63 U2.4 U3.2 U3.8 U4.2 U4.8 U5.5 USB_L1.4 V1.2 | length 634.2
  Top Layer w10: 4740,3430 4775,3395 4771.1,3391.1 U1.12 ; 4753.3,3416.7 cw(c4731.07,3394.47) v1@4762.51,3394.47 ; v1@4764.71,3389.16 cw(c4749.27,3373.72) 4771.1,3373.72 ; 4771.1,3379 cw(c4785.48,3379) v1@4775.31,3389.16 ; 4855,3190 4873.5,3208.5 5059.93,3208.5 U1.63 ; v1(5140,3045) 5160,3045 5180,3065 R4.1 ; v1@5145.3,3039.7 cw(c5158.11,3026.89) 5158.11,3045 cw(c5158.11,3063.11) v1@5145.3,3050.3 ; R4.1@5174.7,3083.2 cw(c5161.89,3070.39) 5180,3070.39 cw(c5198.11,3070.39) R4.1@5185.3,3083.2
  Bottom Layer w10: R22.1 v1(4605,2665) ; R22.1@4562.54,2661.46 cw(c4571.07,2652.93) 4571.07,2665 cw(c4571.07,2677.07) R22.1@4562.54,2668.54 ; v1@4599.7,2659.7 ccw(c4586.89,2646.89) 4586.89,2665 ccw(c4586.89,2683.11) v1@4599.7,2670.3
  other v1: 4715,2395 5310,2410 4325,2450 4450,2450 4745,2705 5150,2715 5215,2715 5060,2840 5205,2940 4185,3070 4505,3070 4845,3080 5140,3195 4435,3255 4655,3315 4770.01,3394.47 4695,3565 5000,3565 4810,3570 4890,3570 4450,3690 4490,3760 4570,3890 4705,4275
GROUND1: U1.8
GROUND2: U1.9
GROUND3: U1.10
GROUND4: U1.11
GROUND5: U1.24
GROUND6: U1.25
LED1: R8.1 U1.56 | length 1402.5
  Top Layer w10: v1(4905,3070) 4905.16,3070.16 U1.56 ; v1@4910.3,3064.7 cw(c4923.49,3051.51) 4923.49,3070.16 ; v1@4910.3,3075.3 ccw(c4922.73,3087.73) 4922.73,3070.16 ; R8.1@5009.63,3938.16 cw(c4996.83,3925.36) 5014.94,3925.36 cw(c5033.04,3925.36) R8.1@5020.24,3938.16 ; R8.1 5014.94,3895.06 v1(5015,3895)
  Mid-Layer 1 w10: v1(4905,3070) 5065,3070 5089.35,3094.35 5089.35,3249.35 5125,3285 5125,3835 5065,3895 v1(5015,3895) ; v1@4910.3,3064.7 cw(c4923.11,3051.89) 4923.11,3070 cw(c4923.11,3088.11) v1@4910.3,3075.3 ; v1@5020.3,3889.7 cw(c5033.11,3876.89) 5033.11,3895 cw(c5033.11,3913.11) v1@5020.3,3900.3
LED2: R9.1 U1.55 | length 1246.3
  Top Layer w10: R9.1@4889.63,3938.16 cw(c4876.83,3925.36) 4894.94,3925.36 cw(c4913.04,3925.36) R9.1@4900.24,3938.16 ; R9.1 4894.94,3900.06 v1(4895,3900) ; v1(4945,3035) 4960.47,3050.47 U1.55
  Mid-Layer 2 w10: v1@4895,3892.5 cw(c4895,3874.39) 4907.8,3887.2 cw(c4920.61,3900) v1@4902.5,3900 ; v1(4895,3900) 5060,3735 5060,3490 5020,3450 5020,3085 4970,3035 v1(4945,3035) ; v1@4950.3,3029.7 cw(c4963.11,3016.89) 4963.11,3035 cw(c4963.11,3053.11) v1@4950.3,3040.3
NetBOOT1_2: BOOT1.2 R4.2 U1.60 | length 1647.1
  Top Layer w10: BOOT1.2 4789,3926 4865,3850 5085,3850 5135,3800 5135,3440 5125,3430 5070,3430 5035,3395 5035,3305 5060,3280 5165,3280 5180,3265 R4.2 5177.4,3148.9 U1.60 ; 5151.61,3148.9 ccw(c5151.61,3175.89) R4.2@5170.7,3156.8 ; R4.2@5174.7,3156.8 ccw(c5161.89,3169.61) 5180,3169.61 ccw(c5198.11,3169.61) R4.2@5185.3,3156.8
NetC3_1: C3.1 U1.31 | length 387.6
  Top Layer w10: v1@4528.23,2958.23 ccw(c4543.16,2973.16) 4543.16,2952.05 ; v1(4530,2960) 4537.95,2952.05 U1.31 ; v1@4535.3,2965.3 ccw(c4567.31,2997.31) 4567.31,2952.05
  Bottom Layer w10: v1(4530,2960) 4550,2980 C3.1 ; v1@4530,2967.5 ccw(c4530,2985.61) 4542.8,2972.8 ccw(c4555.61,2960) v1@4537.5,2960 ; C3.1@4690.93,2972.93 ccw(c4673.86,2955.86) 4673.86,2980 ccw(c4673.86,3004.14) C3.1@4690.93,2987.07
NetC4_1: C4.1 U1.47 | length 163.7
  Top Layer w10: U1.47 4967.95,2779.05 C4.1 ; C4.1@4990,2747 ccw(c4965.86,2747) 4982.93,2764.07 ccw(c5000,2781.14) C4.1@5000,2757
NetC5_2: C5.2 R2.1 U1.7 | length 620.4
  Top Layer w10: v1(4835,3375) 4850,3375 4869.53,3355.47 U1.7 ; v1@4835,3377.5 cw(c4835,3347.32) 4856.34,3368.66 ; v1(5080,3335) 5081.5,3333.5 R2.1 5175,3333.5 5192.5,3333.5 C5.2 ; R2.1@5120.7,3328.2 ccw(c5107.89,3315.39) 5107.89,3333.5 ccw(c5107.89,3351.61) R2.1@5120.7,3338.8 ; R2.1@5139.3,3328.2 cw(c5152.11,3315.39) 5152.11,3333.5 cw(c5152.11,3351.61) R2.1@5139.3,3338.8
  Mid-Layer 1 w10: v1(4835,3375) 5040,3375 v1(5080,3335) ; v1@4840.3,3369.7 cw(c4853.11,3356.89) 4853.11,3375 cw(c4853.11,3393.11) v1@4840.3,3380.3 ; v1@5072.5,3335 ccw(c5054.39,3335) 5067.2,3347.8 ccw(c5080,3360.61) v1@5080,3342.5
NetC6_2: C6.2 U1.6 X1.1 | length 305.2
  Top Layer w10: C6.2 X1.1 4815,3460 4889.21,3385.79 U1.6 ; C6.2@4722.54,3456.46 cw(c4731.07,3447.93) 4731.07,3460 cw(c4731.07,3472.07) C6.2@4722.54,3463.54
NetC7_2: C7.2 U1.5 X1.2 | length 288.9
  Top Layer w10: U1.5 4908.9,3388.9 X1.2 4980,3460 C7.2 ; C7.2@5057.46,3456.46 ccw(c5048.93,3447.93) 5048.93,3460 ccw(c5048.93,3472.07) C7.2@5057.46,3463.54
NetC17_1: C17.1 V1.4 | length 123.3
  Top Layer w10: C17.1 4736.4,3812.4 V1.4 ; C17.1@4740.35,3807.46 cw(c4752.27,3795.55) 4752.27,3812.4 ; V1.4@4800.51,3806.89 ccw(c4787.2,3793.58) 4787.2,3812.4 ccw(c4787.2,3831.22) V1.4@4800.51,3817.91
NetCAN1_3: CAN1.3 D2.1 R12.2 U3.7 | length 1245.6
  Top Layer w10: CAN1.3@4040.16,3290 4205,3290 4317.52,3402.52 4455,3402.52 4547.52,3402.52 4560,3415 v1(4560,3520) ; v1@4554.7,3514.7 cw(c4541.89,3501.89) 4560,3501.89 cw(c4578.11,3501.89) v1@4565.3,3514.7
  Bottom Layer w10: D2.1 4482.16,3461.5 R12.2 ; U3.7 4605,3620 4630,3595 4630,3521.5 R12.2 ; v1@4554.7,3514.7 cw(c4541.89,3501.89) 4560,3501.89 cw(c4578.11,3501.89) v1@4565.3,3514.7 ; 4560,3494.09 ccw(c4598.59,3494.09) R12.2@4571.3,3466.8 ; v1(4560,3520) 4560,3471.5 R12.2 ; R12.2@4560.7,3456.2 ccw(c4547.89,3443.39) 4547.89,3461.5 ccw(c4547.89,3479.61) R12.2@4560.7,3466.8 ; U3.7@4579.71,3614.7 cw(c4592.52,3601.89) 4592.52,3620 cw(c4592.52,3638.11) U3.7@4579.71,3625.3 ; R12.2@4581.5,3461.5 cw(c4609.26,3461.5) 4589.63,3481.13
NetCAN1_4: CAN1.4 D2.2 R12.1 U3.6 | length 1438.3
  Top Layer w10: CAN1.4@3961.42,3290 3961.42,3238.58 3995,3205 4230,3205 4348.78,3323.78 4500,3323.78 ; 4400,3323.78 4500,3323.78 ; v1(4545,3325) 4543.78,3323.78 4500,3323.78
  Bottom Layer w10: D2.2 4482.16,3398.5 4545,3398.5 ; v1@4539.7,3330.3 ccw(c4526.89,3343.11) 4545,3343.11 ccw(c4563.11,3343.11) v1@4550.3,3330.3 ; v1(4545,3325) 4545,3398.5 ; U3.6 4610,3670 4650,3630 4650,3465 4583.5,3398.5 R12.1 4545,3398.5 ; R12.1@4560.7,3393.2 ccw(c4547.89,3380.39) 4547.89,3398.5 ccw(c4547.89,3416.61) R12.1@4560.7,3403.8 ; U3.6@4579.71,3664.7 cw(c4592.52,3651.89) 4592.52,3670 cw(c4592.52,3688.11) U3.6@4579.71,3675.3
NetCAN3_3: CAN3.3 D3.1 R17.2 U4.7 | length 1802.5
  Top Layer w10: CAN3.3 4215,3970 4402.48,4157.48 v1(4402.48,4165)
  Bottom Layer w10: v1(4402.48,4165) 4435,4165 4463.5,4136.5 R17.2 4463.5,3871.5 4475,3860 4785,3860 4810,3885 4810,4007.4 ; v1@4407.78,4159.7 cw(c4420.59,4146.89) 4420.59,4165 cw(c4420.59,4183.11) v1@4407.78,4170.3 ; R17.2@4458.2,3920.7 cw(c4445.39,3907.89) 4463.5,3907.89 cw(c4481.61,3907.89) R17.2@4468.8,3920.7 ; R17.2@4458.2,3939.3 ccw(c4445.39,3952.11) 4463.5,3952.11 ccw(c4481.61,3952.11) R17.2@4468.8,3939.3 ; D3.1 4810,4007.4 ; D3.1@4731.24,3998.41 cw(c4752.94,3976.7) 4752.94,4007.4 cw(c4752.94,4038.1) D3.1@4731.24,4016.39 ; U4.7 4855,4155 4895,4115 4895,4020 4882.4,4007.4 4810,4007.4 ; U4.7@4819.71,4149.7 cw(c4832.52,4136.89) 4832.52,4155 cw(c4832.52,4173.11) U4.7@4819.71,4160.3
NetCAN3_4: CAN3.4 D3.2 R17.1 U4.6 | length 1457.7
  Top Layer w10: CAN3.4 3981.42,3908.58 4020,3870 4240,3870 4350,3980 v1(4530,3980) ; v1@4524.7,3974.7 ccw(c4511.89,3961.89) 4511.89,3980 ccw(c4511.89,3998.11) v1@4524.7,3985.3
  Bottom Layer w10: R17.1@4521.2,3939.3 ccw(c4508.39,3952.11) 4526.5,3952.11 ccw(c4544.61,3952.11) R17.1@4531.8,3939.3 ; v1(4530,3980) 4526.5,3976.5 R17.1 4675,3930 ; R17.1@4531.8,3924.7 cw(c4544.61,3911.89) 4544.61,3930 cw(c4544.61,3948.11) R17.1@4531.8,3935.3 ; 4683.3,3930 ccw(c4683.3,3969.57) D3.2@4711.28,3941.59 ; 4695.85,3930 cw(c4695.85,3908.17) D3.2@4711.28,3923.61 ; D3.2 4718.66,3930 4675,3930 ; U4.6@4769.11,4199.7 ccw(c4756.3,4186.89) 4756.3,4205 ccw(c4756.3,4223.11) U4.6@4769.11,4210.3 ; U4.6 4705,4205 4675,4175 4675,3930
NetD1_1: D1.1 SWD1.3 USB_L1.3 | length 980.9
  Top Layer w20: D1.1 4681.26,2623.62 USB_L1.3 4680,2518.74 v1(4680,2460) ; D1.1@4674.53,2639.33 ccw(c4691.07,2637.37) D1.1@4679.29,2625.59 ; SWD1.3 v1(5281.26,2613.74)
  Bottom Layer w20: v1(4680,2460) 4720,2460 4878.05,2618.05 5276.95,2618.05 v1(5281.26,2613.74) ; 5264.83,2618.05 cw(c5264.83,2597.31) v1@5279.49,2611.97
NetDS1_1: DS1.1 R8.2 | length 106.9
  Top Layer w10: R8.2@5009.63,4011.77 ccw(c4996.67,4024.73) 5015,4024.73 ; R8.2@5015,4006.53 DS1.1 ; 5015,4024.42 ccw(c5032.89,4024.42) R8.2@5020.24,4011.77
NetDS2_1: DS2.1 R9.2 | length 106.9
  Top Layer w10: R9.2@4889.63,4011.77 ccw(c4876.67,4024.73) 4895,4024.73 ; R9.2@4895,4006.53 DS2.1 ; 4895,4024.42 ccw(c4912.89,4024.42) R9.2@4900.24,4011.77
NetR1_2: R1.2 U1.28 | length 252
  Top Layer w10: U1.28 4691.1,3011.1 4710,3030 v1(4710,3080) ; v1@4704.7,3074.7 cw(c4691.89,3061.89) 4710,3061.89 cw(c4728.11,3061.89) v1@4715.3,3074.7
  Bottom Layer w10: R1.2@4688.2,3049.3 ccw(c4675.39,3062.11) 4693.5,3062.11 ccw(c4711.61,3062.11) R1.2@4698.8,3049.3 ; R1.2 4693.5,3063.5 v1(4710,3080)
NetR22_2: R22.2 R23.1 R485.3 U5.7 | length 1784.7
  Top Layer w10: R485.3 4060.16,2659.84 4045,2675 3920,2675 3890,2645 3890,2515 3950,2455 4230,2455 4270,2495 4270,2880 4290,2900 v1(4315,2900) ; v1@4309.7,2894.7 ccw(c4296.89,2881.89) 4296.89,2900 ccw(c4296.89,2918.11) v1@4309.7,2905.3
  Bottom Layer w10: v1@4309.7,2894.7 cw(c4296.89,2881.89) 4315,2881.89 cw(c4333.11,2881.89) v1@4320.3,2894.7 ; v1(4315,2900) 4315,2810 4395,2730 4430,2730 4516,2730 R23.1 4520,2666 R22.2 ; U5.7@4419.11,2724.7 ccw(c4406.3,2711.89) 4406.3,2730 ccw(c4406.3,2748.11) U5.7@4419.11,2735.3 ; U5.7@4469.71,2724.7 cw(c4482.52,2711.89) 4482.52,2730 cw(c4482.52,2748.11) U5.7@4469.71,2735.3 ; 4496.46,2730 cw(c4496.46,2704.27) R23.1@4514.65,2722.46 ; R23.1@4516.46,2722.46 cw(c4507.93,2713.93) 4520,2713.93 cw(c4532.07,2713.93) R23.1@4523.54,2722.46 ; 4520,2681.3 ccw(c4535.49,2681.3) R22.2@4524.54,2670.35
NetR23_2: R23.2 R24.1 R485.4 U5.6 | length 1410.4
  Top Layer w10: R485.4 3981.42,2523.58 4005,2500 4210,2500 4245,2535 4245,2905 4275,2935 v1(4350,2935) ; v1@4344.7,2929.7 ccw(c4331.89,2916.89) 4331.89,2935 ccw(c4331.89,2953.11) v1@4344.7,2940.3
  Bottom Layer w10: v1(4350,2935) 4345,2940 4345,2820 4385,2780 4430,2780 4475,2780 4491,2764 R23.2 R24.1 ; U5.6@4419.11,2774.7 ccw(c4406.3,2761.89) 4406.3,2780 ccw(c4406.3,2798.11) U5.6@4419.11,2785.3 ; U5.6@4464.41,2772.5 cw(c4464.41,2728.83) 4495.29,2759.71 ; U5.6@4464.41,2782.5 cw(c4464.41,2762.97) 4478.22,2776.78 ; R23.2@4514.65,2760.46 ccw(c4506.12,2751.93) 4506.12,2764 ccw(c4506.12,2776.07) R23.2@4514.65,2767.54 ; R23.2@4525.35,2760.46 cw(c4533.88,2751.93) 4533.88,2764 cw(c4533.88,2776.07) R23.2@4525.35,2767.54 ; R24.1@4574.65,2760.46 ccw(c4566.12,2751.93) 4566.12,2764 ccw(c4566.12,2776.07) R24.1@4574.65,2767.54
POWER: BAT+.1 CAN1.1 CAN3.1 R485.1 | length 3584.3
  Top Layer w40: R485.1@4088.58,2958.43 3936.57,2958.43 3865,3030 3865,3630 ; CAN1.1@4088.58,3638.43 3873.43,3638.43 3865,3630 ; BAT+.1 5160,3855 5095,3920 5095,4240 5075,4260 4890,4260 4725,4425 4390,4425 4283.43,4318.43 CAN3.1 3928.43,4318.43 3865,4255 3865,3630
PWM1: U1.14
PWM2: U1.15
PWM7: U1.26
PWM8: U1.27
RX485: U1.37 U5.4 | length 864.3
  Top Layer w10: U1.37 4771.1,2921.1 v1@4795,2945
  Mid-Layer 1 w10: v1(4210,2865) 4355,2865 4725,2865 v1(4800,2940) ; v1@4215.3,2859.7 cw(c4228.11,2846.89) 4228.11,2865 cw(c4228.11,2883.11) v1@4215.3,2870.3 ; v1@4792.5,2940 cw(c4774.39,2940) 4787.2,2927.2 cw(c4800,2914.39) v1@4800,2932.5
  Bottom Layer w10: U5.4@4194.82,2835.43 ccw(c4170.81,2860.59) v1@4205.59,2860.59 ; U5.4@4205.59,2830 v1@4205.59,2860.59 ; U5.4@4205.59,2836.25 cw(c4238.75,2836.25) v1@4215.3,2859.7 ; v1(4210,2865) v1@4205.59,2860.59
SBUS: U1.54
SCL_B: U1.3
SCL_P: U1.22
SCLK_FC: SWD1.2 U1.49 | length 695.3
  Top Layer w10: U1.49 5152.64,2932.36 5200,2885 5200,2830 5320,2710 v1(5320,2715) ; v1@5314.7,2579.7 cw(c5300.37,2565.37) 5320.63,2565.37 ; SWD1.2@5315.81,2543.52 ccw(c5304.19,2555.14) 5320.63,2555.14 ccw(c5337.07,2555.14) SWD1.2@5325.45,2543.52 ; v1(5320,2585) 5320.63,2584.37 SWD1.2 ; 5320.63,2568.41 cw(c5336.59,2568.41) v1@5325.3,2579.7
  Mid-Layer 1 w10: v1@5314.7,2590.3 ccw(c5301.89,2603.11) 5320,2603.11 ccw(c5338.11,2603.11) v1@5325.3,2590.3 ; v1@5314.7,2709.7 cw(c5301.89,2696.89) 5320,2696.89 cw(c5338.11,2696.89) v1@5325.3,2709.7 ; v1(5320,2585) v1(5320,2715)
SDA_B: U1.4
SDA_P: U1.23
SPI2_CK: U1.34
SPI2_SI: U1.36
SPI2_SO: U1.35
SPI3_CK: U1.51 U2.6 | length 937.3
  Top Layer w10: U1.51 5138.27,2971.73 v1(5145,2965) ; 5110.64,2971.73 cw(c5110.64,2930.64) v1@5139.7,2959.7
  Bottom Layer w10: v1@5139.7,2970.3 ccw(c5126.89,2983.11) 5145,2983.11 ccw(c5163.11,2983.11) v1@5150.3,2970.3 ; v1(5145,2965) 5145,2995 5190,3040 5190,3430 5315,3555 U2.6 ; U2.6@5310.88,3639.9 cw(c5300.93,3629.95) 5315,3629.95 cw(c5329.07,3629.95) U2.6@5319.12,3639.9
SPI3_SI: U1.53 U2.5 | length 853.6
  Top Layer w10: U1.53 5176.1,3011.1 5235,3070 5235,3555 v1(5260,3580) ; v1@5252.5,3580 cw(c5234.39,3580) 5247.2,3567.2 cw(c5260,3554.39) v1@5260,3572.5
  Bottom Layer w10: v1(5260,3580) 5265,3585 U2.5 ; U2.5@5260.88,3639.9 cw(c5250.93,3629.95) 5265,3629.95 cw(c5279.07,3629.95) U2.5@5269.12,3639.9
SPI3_SO: U1.52 U2.2 | length 683.3
  Top Layer w10: U1.52 5198.58,2991.42 v1(5200,2990)
  Bottom Layer w10: v1(5200,2990) 5215,3005 5215,3290 5245,3320 5355,3320 5365,3330 U2.2 ; U2.2@5360.88,3356.43 cw(c5350.93,3346.48) 5365,3346.48 cw(c5379.07,3346.48) U2.2@5369.12,3356.43
SWD_FC: SWD1.1 U1.46 | length 735.1
  Top Layer w10: U1.46 4948.27,2671.73 4965,2655 5305,2655 5360,2600 SWD1.1 ; SWD1.1@5355.18,2543.52 ccw(c5343.56,2555.14) 5360,2555.14 ccw(c5376.44,2555.14) SWD1.1@5364.82,2543.52
TX485: U1.38 U5.1 | length 1005.1
  Top Layer w0: U1.38@4788.01,2856.75 U1.38
  Top Layer w10: v1@4635,2812.5 cw(c4635,2794.39) 4647.8,2807.2 cw(c4660.61,2820) v1@4642.5,2820 ; v1(4635,2820) 4665,2790 4780,2790 4790.79,2800.79 U1.38
  Mid-Layer 1 w10: v1@4199.7,2645.3 ccw(c4186.89,2658.11) 4205,2658.11 ccw(c4223.11,2658.11) v1@4210.3,2645.3 ; v1(4205,2640) 4205,2780 4245,2820 v1(4635,2820) ; v1@4629.7,2814.7 ccw(c4616.89,2801.89) 4616.89,2820 ccw(c4616.89,2838.11) v1@4629.7,2825.3
  Bottom Layer w10: U5.1@4194.7,2674.7 cw(c4168.4,2648.4) v1@4205.59,2648.4 ; v1@4199.7,2645.3 ccw(c4185.47,2659.53) 4205.59,2659.53 ; v1(4205,2640) 4205.59,2640.59 U5.1@4205.59,2680 ; 4205.59,2656.68 ccw(c4221.68,2656.68) v1@4210.3,2645.3
TX485_RE: U1.39 U5.2 U5.3 | length 1184.2
  Top Layer w10: v1(4705,2765) 4790,2765 4810.47,2785.47 U1.39 ; v1@4710.3,2759.7 cw(c4723.11,2746.89) 4723.11,2765 cw(c4723.11,2783.11) v1@4710.3,2770.3
  Bottom Layer w10: U5.2@4194.7,2735.3 ccw(c4168.4,2761.6) 4205.59,2761.6 ; U5.3@4194.7,2774.7 cw(c4168.4,2748.4) 4205.59,2748.4 ; U5.3@4205.59,2780 4205.59,2730 4310,2730 4325,2715 4325,2580 4350,2555 4605,2555 4705,2655 v1(4705,2765) ; U5.2@4245.3,2724.7 cw(c4258.11,2711.89) 4258.11,2730 cw(c4258.11,2748.11) U5.2@4245.3,2735.3 ; v1@4699.7,2759.7 cw(c4686.89,2746.89) 4705,2746.89 cw(c4723.11,2746.89) v1@4710.3,2759.7
UART1_R_1: U1.43
UART1_T_1: U1.42
UART2_R_1: U1.17
UART2_T_1: U1.16
UART3_R_1: PIO.4 U1.30 | length 1324.2
  Top Layer w10: v1(4485,2990) 4540,2990 4558.27,2971.73 U1.30 ; v1@4490.3,2984.7 cw(c4503.11,2971.89) 4503.11,2990 cw(c4503.11,3008.11) v1@4490.3,2995.3
  Mid-Layer 1 w10: v1(4485,2990) 4870,2990 4890,2970 4940,2970 5020,2890 5350,2890 PIO.4 ; v1@4490.3,2984.7 cw(c4503.11,2971.89) 4503.11,2990 cw(c4503.11,3008.11) v1@4490.3,2995.3 ; PIO.4@5375.47,2940 cw(c5316.26,2940) 5358.13,2898.13 cw(c5400,2856.26) PIO.4@5400,2915.47 ; PIO.4@5385.47,2940 cw(c5350.4,2940) 5375.2,2915.2 cw(c5400,2890.4) PIO.4@5400,2925.47
UART3_T_1: PIO.6 U1.29 | length 1295.1
  Top Layer w10: v1(4470,3025) 4530,3025 4563.58,2991.42 U1.29 ; v1@4475.3,3019.7 cw(c4488.11,3006.89) 4488.11,3025 cw(c4488.11,3043.11) v1@4475.3,3030.3
  Mid-Layer 1 w10: v1(4470,3025) 4890,3025 4915,3000 5155,3000 5180,3025 5223.5,3025 5258.5,2990 5365,2990 PIO.6@5410,3035 ; v1@4475.3,3019.7 cw(c4488.11,3006.89) 4488.11,3025 cw(c4488.11,3043.11) v1@4475.3,3030.3 ; 5372.5,2997.5 ccw(c5352.77,3017.23) PIO.6@5377.91,3029.35 ; 5382.46,3007.46 ccw(c5366.21,3023.71) PIO.6@5386.91,3033.69 ; 5383.74,3008.74 cw(c5400,2992.47) PIO.6@5400,3015.47
pads on no net: PIO.3 PIO.5 PIO.8 PIO.10 SWD1.1. SWD1.A U1.2 U1.33 U1.40 U1.50 U3.5 U4.5 USB_L1.1. USB_L1.A
copper on no net:
  other v2: 5030,2480 5030,4410

## Polygon pours and split planes (outlines as drawn)
GND on Top Layer "Top Layer-No Net" (solid, remove dead copper, pour order 1000): 3597.23,4771.62 3597.23,2113.18 3600.79,2106.62 3686.35,2264.15 5640,2264.15 5640,4561.57 5529.48,4765.05
GND on Bottom Layer "Top Layer-No Net" (solid, remove dead copper, pour order 1001): 3445.68,4647.22 3402.49,4581.44 3402.49,2174.19 5691.35,2174.19 5717.27,2213.65 5795,2332.04 5795,4666.95

## Keep-outs
Keep-Out Layer:
  lines w5: 5150,4465 5150,4025 5195,3980 5470,3980
  lines w9: 3635,2430 3635,4460 ; 3745,2340 5364.92,2340 ; 5470,2445 5470,3980
  lines w10: 3634.92,4454.1 cw(c3742.94,4452.04) 3745,4560.06 5060,4560.02 ; 3635,2450 ccw(c3743.02,2447.94) 3740.96,2339.92 ; 5043.42,4560.02 cw(c5041.36,4452) 5149.38,4449.94 ; 5359.92,2339.04 ccw(c5361.98,2447.06) 5470,2445

## Silkscreen, mask and mechanical layers (free items; w line width, h text height)
Top Overlay:
  rectangle: 5375,3710 5470,3895
  lines w15: 5200,3705 5200,3640 5415,3640 ; 5200,3905 5200,3955 ; 5205,3960 5420,3960
  lines w30: 5200,3955 5205,3960
  text "CAN2" at 3665,4470 h40
  text "BAT+" at 4045,4390 h40
  text "LH" at 4020,3890 h40
  text "CAN1" at 3660,3795 h40
  text "+G" at 5160,3750 h40 r270
  text "BAT+" at 4050,3710 h40
  text "LHG+" at 4450,3590 h40 r90
  text "LH" at 4010,3215 h40
  text "BAT+" at 4045,3045 h40
  text "-+PM" at 4681.26,2590 h40 r180
  text "-+CD" at 5250,2585 h40 r180
  text "AB" at 4010,2540 h40
  text "BotHub-ExtCan" at 3735,2365 h70
  text "V1.2" at 4215,2365 h40

## Text inside footprints (layer, text, board x,y; h text height)
PIO: Bottom Overlay "10" at 5380,3300 h50 r270; Bottom Overlay "9" at 5280,3300 h50 r270; Bottom Overlay "1" at 5280,2760 h50 r270; Bottom Overlay "2" at 5380,2740 h50 r270